# EAGLE board parport (EAGLE 7.7.0)
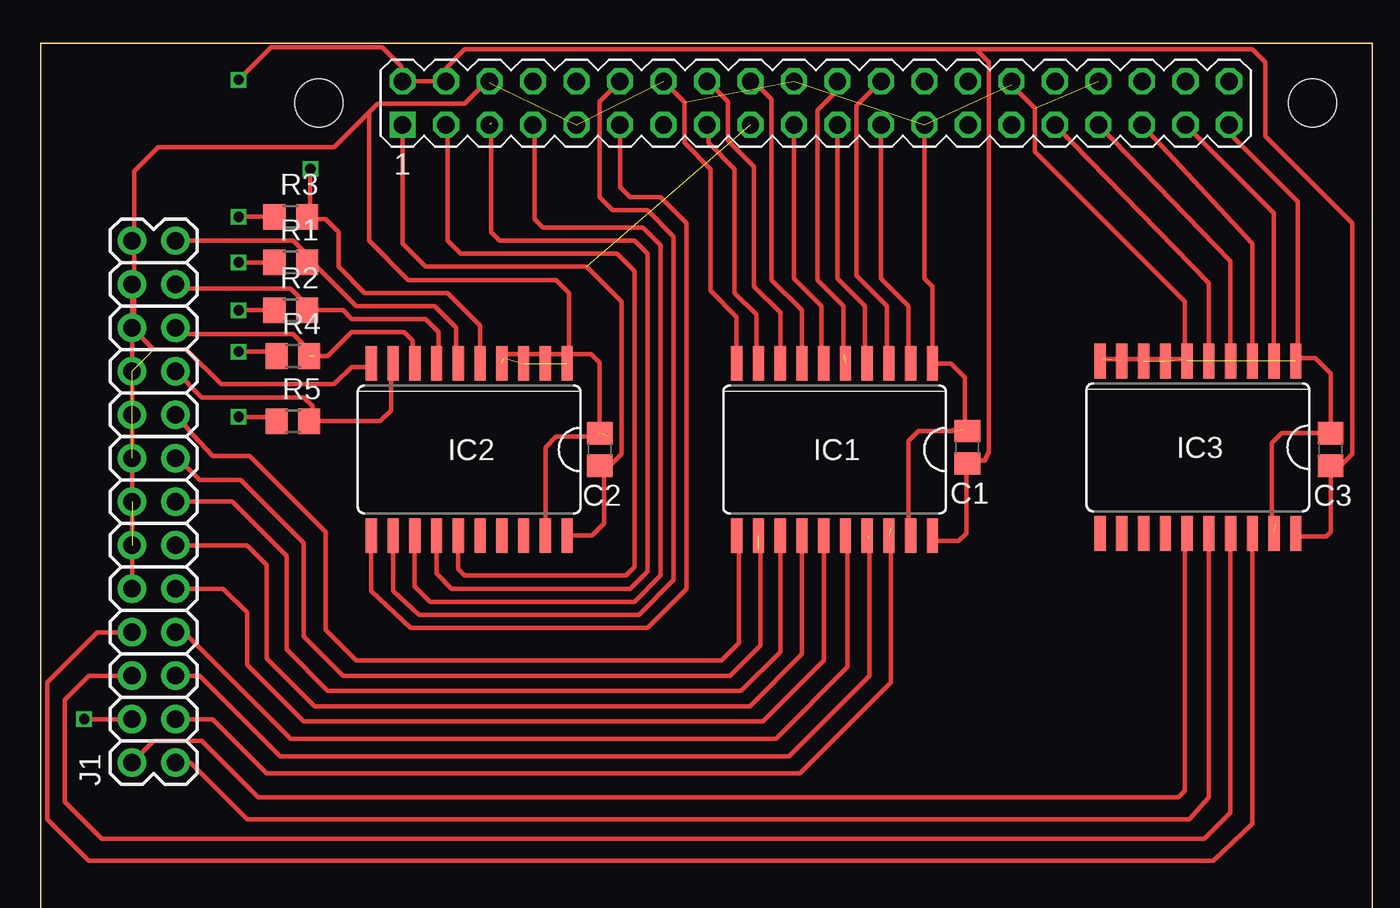
[diagram p0: board, top side]
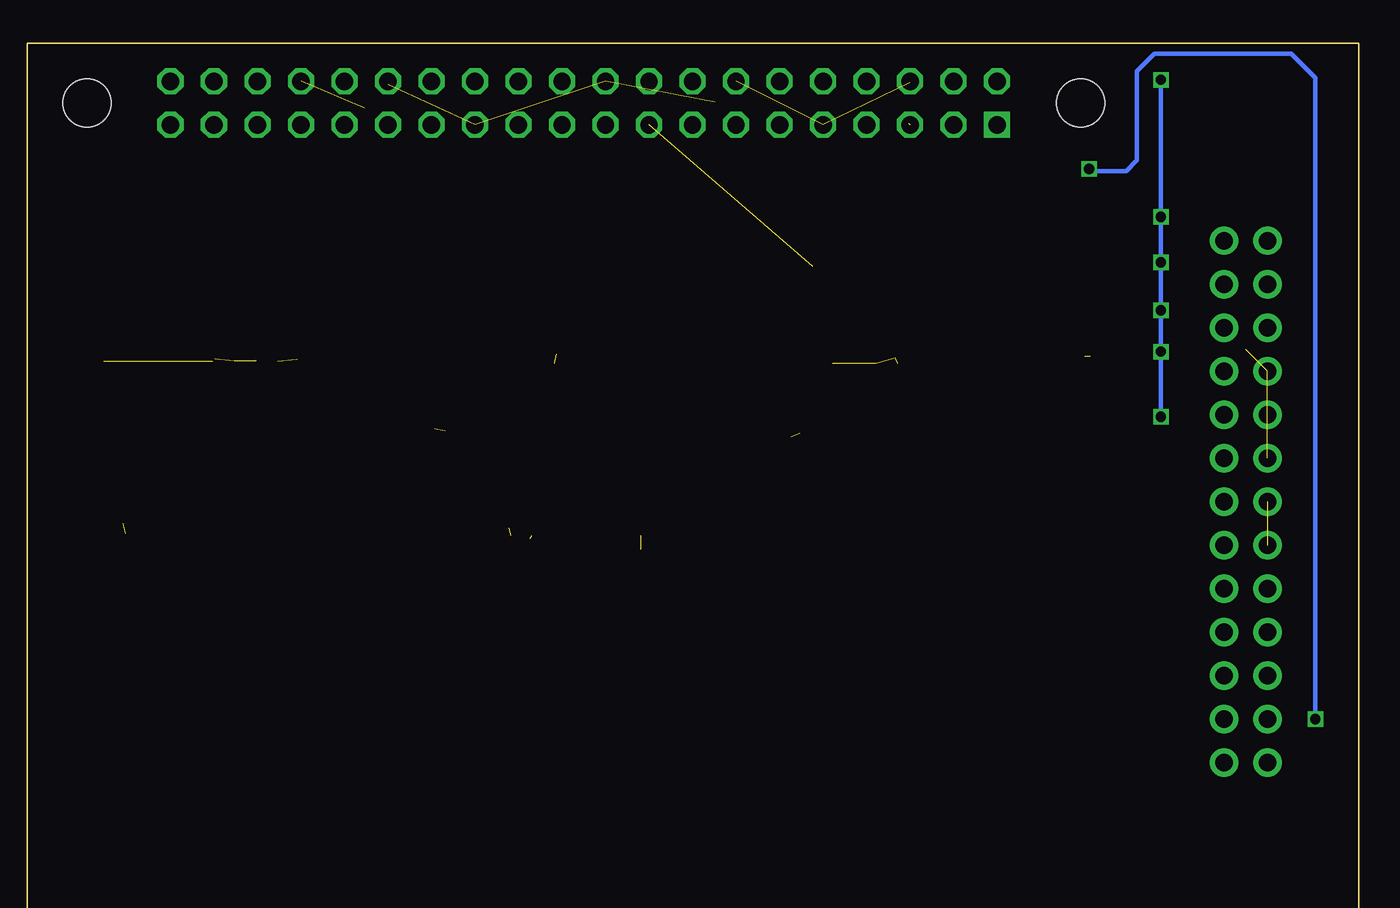
[diagram p1: board, bottom side, seen from below]

No outline drawn. Coordinates in mm, seen from the top.
Copper layers (1*16): Top 0.035mm / dielectric 1.5mm / Bottom 0.035mm
Design rules "ITEADstudio_DRC": minimum track width 6mil, minimum drill 12mil, track to track 6mil, track to pad 6mil, pad to pad 6mil, via to via 6mil, smd to smd 0mil, copper to edge 10mil, drill to drill 10mil, minimum pad ring 10mil, minimum via ring 6mil, stop-mask expansion 2mil, vias tented up to drill 100mil, thermal gap 10mil
Holes 2.8 mm at 49.4,7.3 49.4,56.3 107.4,56.3 107.4,7.3
tRestrict: area 105.9,54.8 to 109,57.8; area 105.9,5.8 to 109,8.8
bRestrict: area 47.9,54.8 to 50.9,57.8; area 105.9,5.8 to 109,8.8; area 105.9,54.8 to 109,57.8; area 47.9,5.8 to 50.9,8.8
Milling: 4 lines

## Footprints (pad centres in the part's own frame; a part is rotated, then mirrored left to right if it is on the bottom)
C0805 = smd 1.3 x 1.5: 1 -0.95,0; 2 0.95,0
SO20W = smd 0.66 x 2.032: 1 -5.715,-5.029; 2 -4.445,-5.029; 3 -3.175,-5.029; 4 -1.905,-5.029; 5 -0.635,-5.029; 6 0.635,-5.029; 7 1.905,-5.029; 8 3.175,-5.029; 9 4.445,-5.029; 10 5.715,-5.029; 11 5.715,5.029; 12 4.445,5.029; 13 3.175,5.029; 14 1.905,5.029; 15 0.635,5.029; 16 -0.635,5.029; 17 -1.905,5.029; 18 -3.175,5.029; 19 -4.445,5.029; 20 -5.715,5.029
2X13 = drill 1.016 pad 1.651: 1 0,0; 2 0,2.54; 3 2.54,0; 4 2.54,2.54; 5 5.08,0; 6 5.08,2.54; 7 7.62,0; 8 7.62,2.54; 9 10.16,0; 10 10.16,2.54; 11 12.7,0; 12 12.7,2.54; 13 15.24,0; 14 15.24,2.54; 15 17.78,0; 16 17.78,2.54; 17 20.32,0; 18 20.32,2.54; 19 22.86,0; 20 22.86,2.54; 21 25.4,0; 22 25.4,2.54; 23 27.94,0; 24 27.94,2.54; 25 30.48,0; 26 30.48,2.54
PIN_20X2 = drill 1.016 square: 1 -24.13,-1.27 | drill 1.016 octagon: 2 -24.13,1.27; 3 -21.59,-1.27; 4 -21.59,1.27; 5 -19.05,-1.27; 6 -19.05,1.27; 7 -16.51,-1.27; 8 -16.51,1.27; 9 -13.97,-1.27; 10 -13.97,1.27; 11 -11.43,-1.27; 12 -11.43,1.27; 13 -8.89,-1.27; 14 -8.89,1.27; 15 -6.35,-1.27; 16 -6.35,1.27; 17 -3.81,-1.27; 18 -3.81,1.27; 19 -1.27,-1.27; 20 -1.27,1.27; 21 1.27,-1.27; 22 1.27,1.27; 23 3.81,-1.27; 24 3.81,1.27; 25 6.35,-1.27; 26 6.35,1.27; 27 8.89,-1.27; 28 8.89,1.27; 29 11.43,-1.27; 30 11.43,1.27; 31 13.97,-1.27; 32 13.97,1.27; 33 16.51,-1.27; 34 16.51,1.27; 35 19.05,-1.27; 36 19.05,1.27; 37 21.59,-1.27; 38 21.59,1.27; 39 24.13,-1.27; 40 24.13,1.27
R0805 = smd 1.3 x 1.5: 1 -0.95,0; 2 0.95,0

## Placement (x,y rotation side)
C1  100nF  [C0805]  87.25,36.2 90 top
C2  100nF  [C0805]  65.79,36.07 90 top
C3  100nF  [C0805]  108.46,36.07 90 top
IC1  74LS541DW  [SO20W]  79.5,36.07 180 top
IC2  74LS541DW  [SO20W]  58.17,36.07 180 top
IC3  74LS541DW  [SO20W]  100.71,36.2 180 top
J1  [2X13]  41.02,17.78 90 top
K1  PIN20X2  [PIN_20X2]  78.4,56.3 0 top
R1  4.3K  [R0805]  47.75,46.99 0 top
R2  4.3K  [R0805]  47.75,44.2 0 top
R3  4.3K  [R0805]  47.75,49.66 0 top
R4  4.3K  [R0805]  47.88,41.53 0 top
R5  4.3K  [R0805]  47.88,37.72 0 top

## Library data of the parts
C1-C3 R1-R5 = resistor
IC1-IC3 = 74xx-us
J1 = SparkFun-Connectors
K1 = FLYFISH

## Nets
+3V3: C2.1 IC2.20 K1.1 K1.17
+5V: C1.1 C3.1 IC1.20 IC3.20 K1.2 K1.4 R1.1 R2.1 R3.1 R4.1 R5.1
CONTROL0: IC3.16 J1.1
CONTROL1: IC3.15 J1.2
CONTROL2: IC3.17 J1.6
CONTROL3: IC3.18 J1.8
DATA0: IC1.18 J1.3
DATA1: IC1.17 J1.5
DATA2: IC1.16 J1.7
DATA3: IC1.15 J1.9
DATA4: IC1.14 J1.11
DATA5: IC1.13 J1.13
DATA6: IC1.12 J1.15
DATA7: IC1.11 J1.17
GND: C1.2 C2.2 C3.2 IC1.1 IC1.10 IC1.19 IC2.1 IC2.2 IC2.3 IC2.4 IC2.10 IC2.19 IC3.1 IC3.6 IC3.7 IC3.8 IC3.9 IC3.10 IC3.19 J1.10 J1.12 J1.14 J1.16 J1.18 J1.20 J1.22 J1.24 K1.6 K1.9 K1.14 K1.20 K1.25 K1.30 K1.34 K1.39
GPIO2: IC2.15 K1.3
GPIO3: IC2.14 K1.5
GPIO4: IC2.13 K1.7
GPIO5: K1.29
GPIO6: IC3.5 K1.31
GPIO7: K1.26
GPIO8: IC1.3 K1.24
GPIO9: IC1.4 K1.21
GPIO10: IC1.6 K1.19
GPIO11: IC1.2 K1.23
GPIO13: IC3.4 K1.33
GPIO16: K1.36
GPIO17: IC2.11 K1.11
GPIO18: IC2.12 K1.12
GPIO19: IC3.3 K1.35
GPIO20: K1.38
GPIO21: K1.40
GPIO22: IC1.9 K1.15
GPIO23: IC1.8 K1.16
GPIO24: IC1.7 K1.18
GPIO25: IC1.5 K1.22
GPIO26: IC3.2 K1.37
ID_SC: K1.28
ID_SD: K1.27
RXD0: K1.10
STATUS3: IC2.5 J1.4 R3.2
STATUS4: IC2.6 J1.25 R1.2
STATUS5: IC2.7 J1.23 R2.2
STATUS6: IC2.9 J1.19 R5.2
STATUS7: IC2.8 J1.21 R4.2
TXD0: K1.8

## Tracks (layer width: path | path; a pad name or v marks a point on that pad's centre or on a via)
+3V3  (1 unrouted)
  Top 0.254: K1.1 54.27,48.09 55.63,46.74 65.02,46.74 67.06,44.7 67.06,35.81 66.36,35.12 C2.1 66.04,34.86 66.04,31.75 65.33,31.04 IC2.20
+5V  (via drill 0.6)
  Top 0.254: 87.76,59.44 57.91,59.44 56.81,58.33 K1.4 K1.2 54.23,57.61 54.23,58.42 53.09,59.56 46.61,59.56 v44.7,57.66 | 87.76,59.44 103.89,59.44 104.65,58.67 104.65,54.36 109.73,49.28 109.73,35.81 109.03,35.12 C3.1 108.46,31.24 108.2,30.99 106.6,30.99 IC3.20 | 87.18,35.18 C1.1 | 87.18,35.18 87.18,31.18 86.74,30.73 85.52,30.73 IC1.20 | 87.18,35.18 87.18,35.24 87.38,35.43 88.27,35.43 88.52,35.94 88.52,58.67 87.76,59.44 | v44.7,49.66 R3.1 | R1.1 v44.7,46.99 | R2.1 v44.7,44.2 | R4.1 46.93,41.78 v44.7,41.78 | R5.1 46.93,37.97 v44.7,37.97
  Bottom 0.254: v44.7,57.66 v44.7,49.66 v44.7,46.99 v44.7,44.2 v44.7,41.78 v44.7,37.97
CONTROL0
  Top 0.254: J1.1 41.91,17.78 45.21,14.48 100.2,14.48 101.35,15.75 IC3.16
CONTROL1
  Top 0.254: J1.2 39.75,19.05 42.55,19.05 45.85,15.75 99.57,15.75 99.95,16.13 99.95,31.04 IC3.15
CONTROL2
  Top 0.254: IC3.17 102.62,14.86 101.09,13.34 36.7,13.34 34.54,15.49 34.54,21.46 35.94,22.86 J1.6
CONTROL3
  Top 0.254: J1.8 36.45,25.4 33.53,22.48 33.53,14.48 35.94,12.06 101.6,12.06 103.89,14.22 IC3.18
DATA0  (1 unrouted)
  Top 0.254: 82.8,30.91 IC1.18 | J1.3 43.18,20.32 46.35,17.14 77.47,17.14 82.8,22.48 82.8,31.5 82.68,31.62
DATA1  (1 unrouted)
  Top 0.254: J1.5 42.42,22.86 47.12,18.16 76.83,18.16 81.53,22.86 81.53,30.86
DATA2
  Top 0.254: J1.7 41.53,25.4 47.75,19.18 76.07,19.18 80.26,23.37 80.26,30.91 IC1.16
DATA3
  Top 0.254: J1.9 43.81,27.94 45.21,26.54 45.21,23.5 48.51,20.19 75.31,20.19 78.87,23.75 IC1.15
DATA4
  Top 0.254: J1.11 45.21,30.48 46.35,29.34 46.35,23.88 49.15,21.08 74.55,21.08 77.6,24.13 IC1.14
DATA5
  Top 0.254: IC1.13 76.33,24.26 74.04,21.97 49.91,21.97 47.5,24.38 47.5,29.84 44.32,33.02 J1.13
DATA6  (1 unrouted)
  Top 0.254: J1.15 41.4,35.31 42.42,34.29 44.83,34.29 48.51,30.61 48.51,25.15 50.8,22.86 73.41,22.86 75.18,24.64 75.18,30.1 75.06,30.23
DATA7
  Top 0.254: J1.17 42.04,36.96 43.18,35.69 45.34,35.69 49.78,31.24 49.78,25.53 51.56,23.75 72.9,23.75 73.91,24.77 73.91,30.91 IC1.11
GND  (21 unrouted)
  Top 0.254: IC2.10 52.25,40.89 51.31,40.89 50.29,39.88 43.69,39.88 41.66,41.91 39.75,41.91 J1.22 | 60.2,41.4 59.94,41.66 65.28,41.66 65.79,41.15 C2.2 | IC2.19 62.61,36.2 63.25,36.83 66.29,36.83 | IC1.19 83.82,31.17 83.82,36.58 84.39,37.15 86.49,37.15 86.42,37.21 | IC1.10 73.79,43.81 72.26,45.34 72.26,52.45 70.74,53.98 70.74,56.34 K1.14 | K1.25 84.75,46.06 85.22,45.59 IC1.1 86.28,41.1 87.12,40.26 87.12,37.27 C1.2 | K1.30 89.83,57.36 91.19,56.01 91.19,53.47 99.95,44.7 99.95,41.35 | 99.95,41.35 IC3.6 | 99.95,41.35 95.12,41.35 IC3.10 | K1.39 102.53,54.57 106.55,50.55 106.55,41.35 IC3.1 106.6,41.4 107.57,41.4 108.46,40.51 C3.2 105.6,37.02 105.03,36.45 105.03,32 105.28,31.75 | 52.32,55.75 52.83,56.26 57.91,56.26 59.22,57.57 K1.6 59.35,57.49 | 52.32,55.75 52.32,48.26 54.61,45.97 63.25,45.97 64.01,45.21 64.01,41.22 IC2.1 | J1.24 J1.22 | J1.22 J1.12 J1.10 | J1.22 38.61,43.18 38.61,52.32 40.01,53.72 50.29,53.72 52.32,55.75
GPIO2
  Top 0.254: IC2.15 57.53,29.08 57.91,28.7 67.31,28.7 67.82,29.21 67.82,46.48 66.8,47.5 57.66,47.5 56.9,48.26 56.9,54.94 K1.3
GPIO3  (1 unrouted)
  Top 0.254: IC2.14 56.26,28.83 57.15,27.94 67.56,27.94 68.58,28.96 68.58,47.5 67.82,48.26 59.94,48.26 59.44,48.77 59.44,55.12
GPIO4
  Top 0.254: IC2.13 54.99,28.07 55.88,27.18 67.82,27.18 69.34,28.7 69.34,48.01 68.33,49.02 62.48,49.02 61.98,49.53 61.98,54.94 K1.7
GPIO6
  Top 0.254: K1.31 101.35,45.8 IC3.5
GPIO8
  Top 0.254: K1.24 | K1.24 82.55,57.91 | K1.24 80.77,56.13 80.77,46.23 82.55,44.45 82.55,41.22 IC1.3
GPIO9
  Top 0.254: K1.21 79.67,46.06 81.28,44.45 81.28,41.22 IC1.4
GPIO10
  Top 0.254: K1.19 77.13,46.06 78.74,44.45 78.74,41.22 IC1.6
GPIO11
  Top 0.254: K1.23 82.21,46.06 83.82,44.45 83.82,41.22 IC1.2
GPIO13
  Top 0.254: K1.33 102.62,47.07 IC3.4
GPIO17
  Top 0.254: IC2.11 52.45,27.81 54.74,25.65 68.58,25.65 70.87,27.94 70.87,49.28 69.34,50.8 67.56,50.8 66.97,51.39 K1.11
GPIO18
  Top 0.254: IC2.12 53.72,27.81 55.24,26.42 68.07,26.42 70.1,28.45 70.1,48.51 68.58,50.04 66.55,50.04 65.79,50.8 65.79,56.39 K1.12
GPIO19
  Top 0.254: K1.35 103.89,48.09 IC3.3
GPIO22
  Top 0.254: K1.15 72.1,55.03 72.14,54.99 72.14,53.98 73.66,52.45 73.66,45.21 74.93,43.94 74.93,41.22 IC1.9
GPIO23
  Top 0.254: K1.16 72.1,57.57 73.28,56.39 73.28,54.1 74.8,52.58 74.8,45.59 76.33,44.07 IC1.8
GPIO24
  Top 0.254: K1.18 74.76,57.57 75.82,56.52 75.82,45.97 77.6,44.2 IC1.7
GPIO25  (1 unrouted)
  Top 0.254: K1.22 79.67,57.06 78.49,55.88 78.49,45.97 80.01,44.45 80.01,41.66
GPIO26
  Top 0.254: K1.37 105.16,49.86 IC3.2
STATUS3  (via drill 0.6)
  Top 0.254: IC2.5 58.8,43.31 56.9,45.21 52.07,45.21 50.55,46.74 50.55,48.77 49.78,49.53 48.83,49.53 R3.2 48.9,49.85 v48.9,52.45 | J1.4 v35.69,20.32
  Bottom 0.254: v35.69,20.32 35.69,57.78 37.08,59.18 45.09,59.18 46.1,58.17 46.1,52.96 46.74,52.32 48.77,52.32 v48.9,52.45
STATUS4
  Top 0.254: J1.25 47.88,48.26 48.7,47.44 R1.2 49.02,46.99 51.56,44.45 56.13,44.45 57.4,43.18 57.4,41.22 IC2.6
STATUS5
  Top 0.254: IC2.7 56.39,41.22 56.39,42.93 55.63,43.69 51.31,43.69 50.8,44.2 R2.2 48.7,44.52 47.75,45.47 41.27,45.47 J1.23
STATUS6
  Top 0.254: IC2.9 53.59,40.97 53.59,38.35 52.96,37.72 R5.2 49.02,37.91 49.02,38.61 48.51,39.12 42.55,39.12 J1.19
STATUS7  (1 unrouted)
  Top 0.254: IC2.8 54.86,41.22 54.86,42.42 54.36,42.93 51.31,42.93 49.91,41.53 49.15,41.53 47.88,42.8 41.4,42.8 J1.21